# Altium PCB Enc30x20 136.PcbDoc
Units mm, origin at the board's own origin, x right, y up, seen from the top; angles counter-clockwise.
Board outline 113 x 105 mm, 2 copper layers (Top Layer, Bottom Layer), stack 1.525 mm thick; 4 components, 3 nets, 4 pads, 0 vias.
Unrouted connection lines stored in the file: 7.
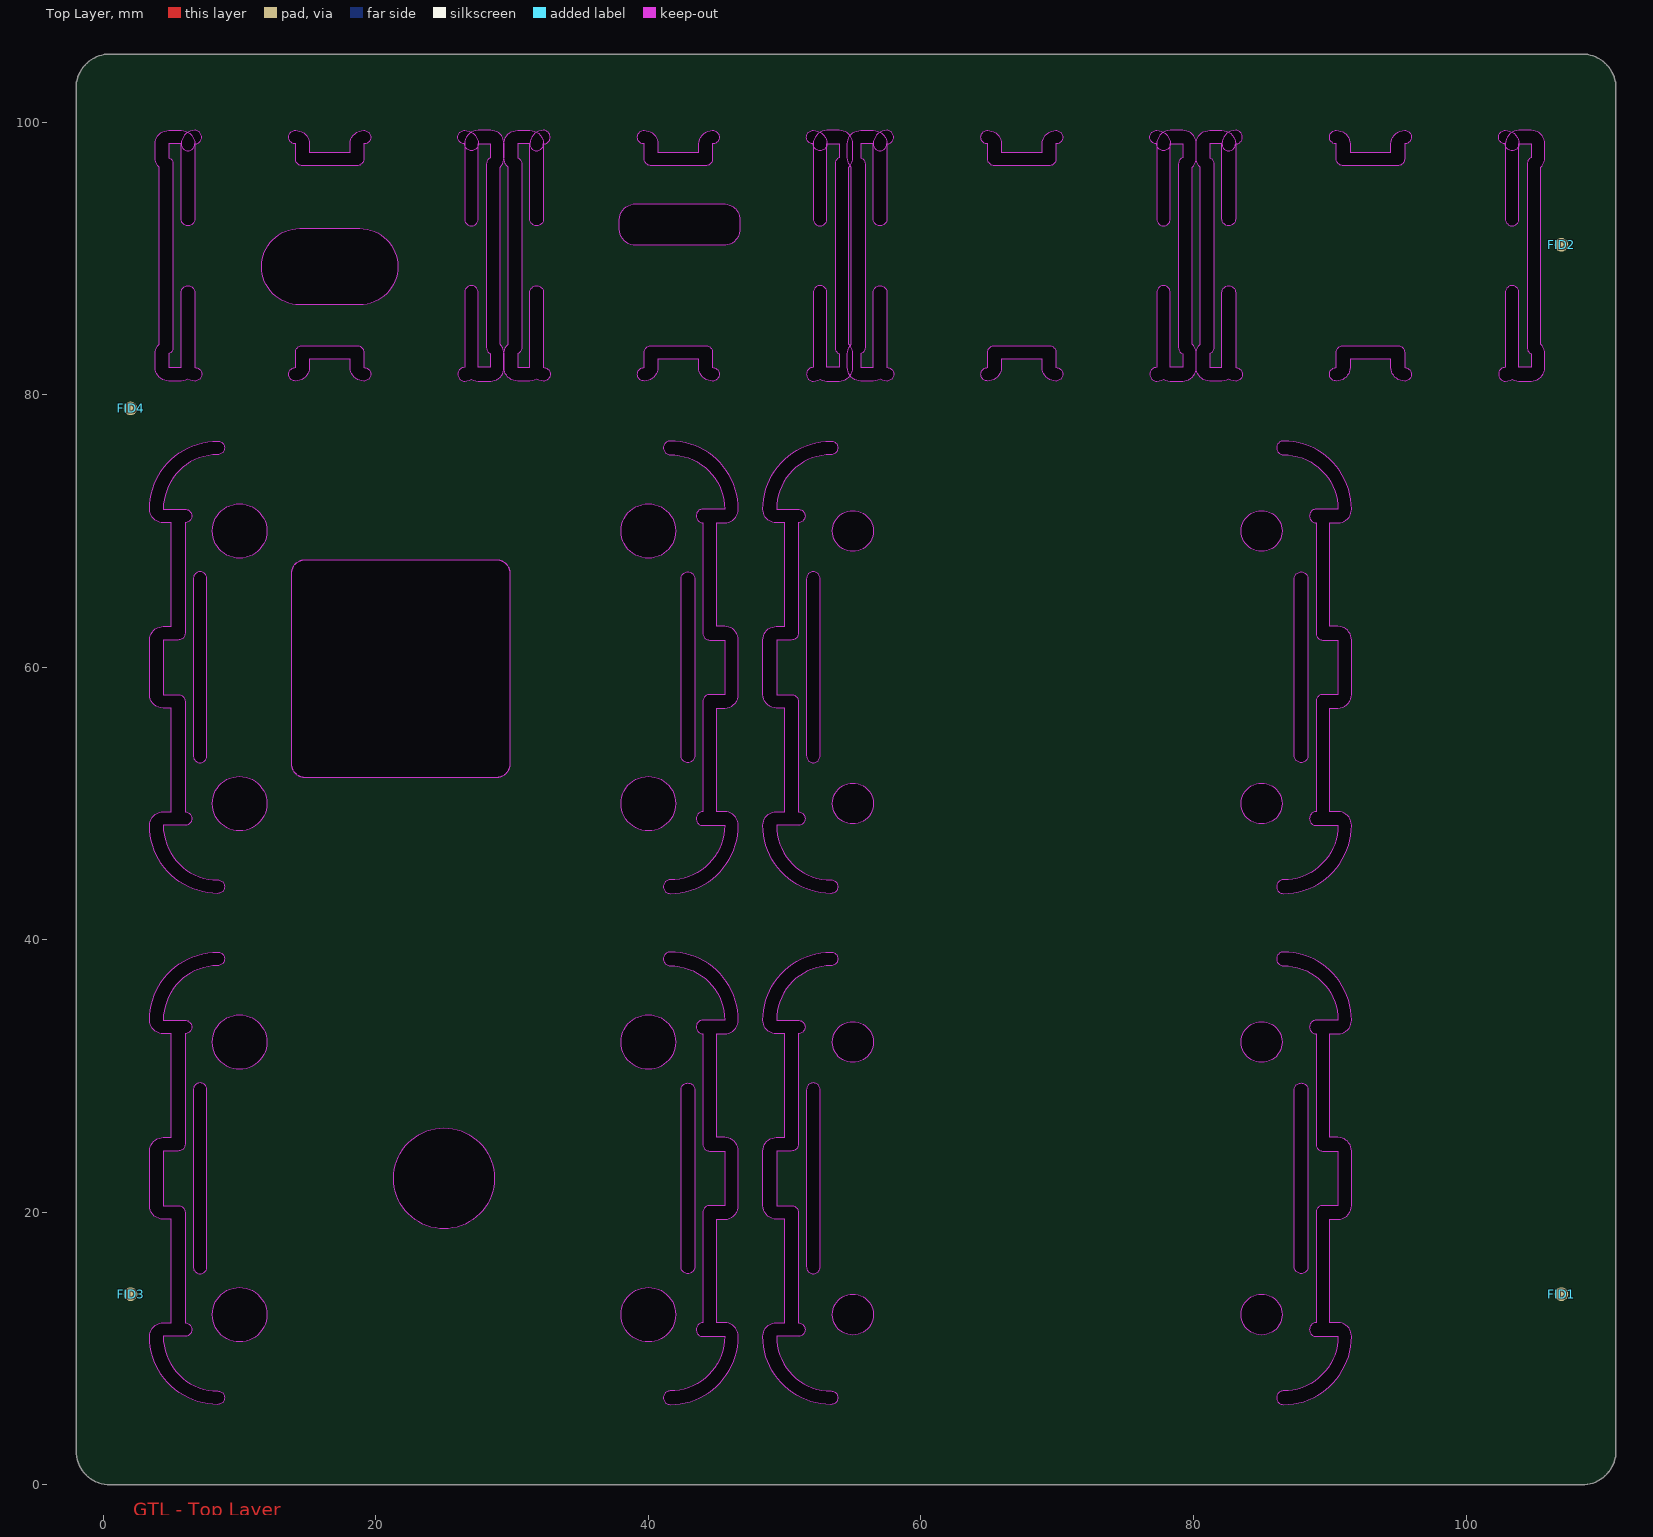
[diagram p0: Top Layer view]
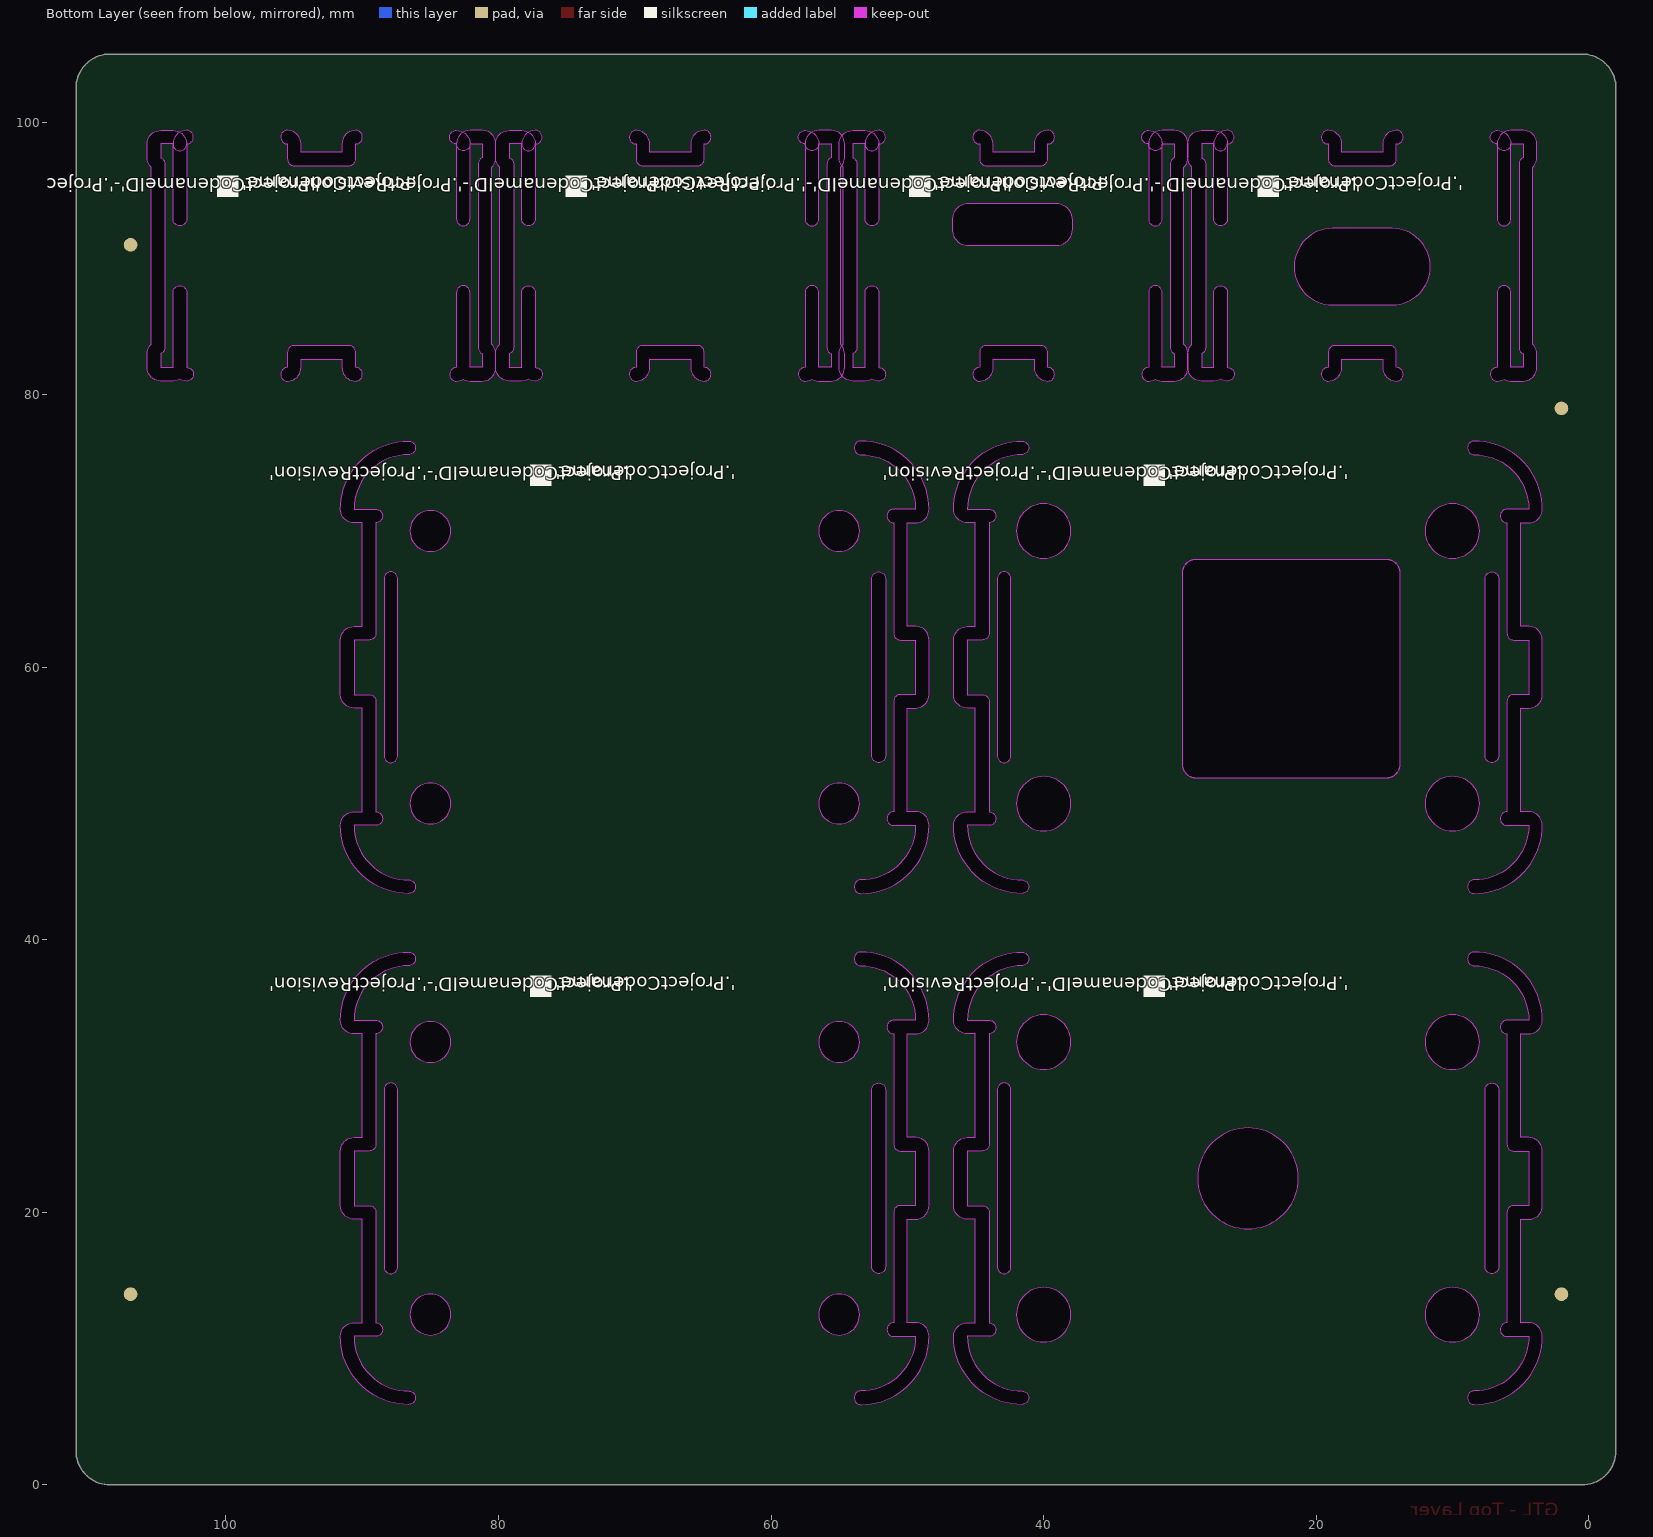
[diagram p1: Bottom Layer view, seen from below]

## Layer stack, top to bottom
Top Solder: solder mask 0.0102, Solder Resist, Dk 3.5
Top Layer: signal copper 0.0356
Dielectric 1: core 1.454, FR-4, Dk 4.2
Bottom Layer: signal copper 0.0356
Bottom Solder: solder mask 0.0102, Solder Resist, Dk 3.5

## Board outline
-2,2.5 -2,102.5 cw(c0.5,102.5) 0.5,105 108.5,105 cw(c108.5,102.5) 111,102.5 111,2.5 cw(c108.5,2.5) 108.5,0 0.5,0 cw(c0.5,2.5)
cut-out: 87.9,15.5 cw(c87.9,16) 87.4,16 87.4,29 cw(c87.9,29) 87.9,29.5 cw(c87.9,29) 88.4,29 88.4,16 cw(c87.9,16)
cut-out: 52.1,15.5 ccw(c52.1,16) 52.6,16 52.6,29 ccw(c52.1,29) 52.1,29.5 ccw(c52.1,29) 51.6,29 51.6,16 ccw(c52.1,16)
cut-out: 87.9,53 cw(c87.9,53.5) 87.4,53.5 87.4,66.5 cw(c87.9,66.5) 87.9,67 cw(c87.9,66.5) 88.4,66.5 88.4,53.5 cw(c87.9,53.5)
cut-out: 52.1,53 ccw(c52.1,53.5) 52.6,53.5 52.6,66.5 ccw(c52.1,66.5) 52.1,67 ccw(c52.1,66.5) 51.6,66.5 51.6,53.5 ccw(c52.1,53.5)
cut-out: 42.9,53 cw(c42.9,53.5) 42.4,53.5 42.4,66.5 cw(c42.9,66.5) 42.9,67 cw(c42.9,66.5) 43.4,66.5 43.4,53.5 cw(c42.9,53.5)
cut-out: 7.1,53 ccw(c7.1,53.5) 7.6,53.5 7.6,66.5 ccw(c7.1,66.5) 7.1,67 ccw(c7.1,66.5) 6.6,66.5 6.6,53.5 ccw(c7.1,53.5)
cut-out: 7.1,15.5 ccw(c7.1,16) 7.6,16 7.6,29 ccw(c7.1,29) 7.1,29.5 ccw(c7.1,29) 6.6,29 6.6,16 ccw(c7.1,16)
cut-out: 42.9,15.5 cw(c42.9,16) 42.4,16 42.4,29 cw(c42.9,29) 42.9,29.5 cw(c42.9,29) 43.4,29 43.4,16 cw(c42.9,16)
cut-out: 55,11 cw(c55,12.5) 53.5,12.5 cw(c55,12.5) 55,14 cw(c55,12.5) 56.5,12.5 cw(c55,12.5)
cut-out: 55,31 cw(c55,32.5) 53.5,32.5 cw(c55,32.5) 55,34 cw(c55,32.5) 56.5,32.5 cw(c55,32.5)
cut-out: 85,31 cw(c85,32.5) 83.5,32.5 cw(c85,32.5) 85,34 cw(c85,32.5) 86.5,32.5 cw(c85,32.5)
cut-out: 85,11 cw(c85,12.5) 83.5,12.5 cw(c85,12.5) 85,14 cw(c85,12.5) 86.5,12.5 cw(c85,12.5)
cut-out: 85,48.5 cw(c85,50) 83.5,50 cw(c85,50) 85,51.5 cw(c85,50) 86.5,50 cw(c85,50)
cut-out: 85,68.5 cw(c85,70) 83.5,70 cw(c85,70) 85,71.5 cw(c85,70) 86.5,70 cw(c85,70)
cut-out: 55,68.5 cw(c55,70) 53.5,70 cw(c55,70) 55,71.5 cw(c55,70) 56.5,70 cw(c55,70)
cut-out: 55,48.5 cw(c55,50) 53.5,50 cw(c55,50) 55,51.5 cw(c55,50) 56.5,50 cw(c55,50)
cut-out: 40,30.5 cw(c40,32.5) 38,32.5 cw(c40,32.5) 40,34.5 cw(c40,32.5) 42,32.5 cw(c40,32.5)
cut-out: 40,10.5 cw(c40,12.5) 38,12.5 cw(c40,12.5) 40,14.5 cw(c40,12.5) 42,12.5 cw(c40,12.5)
cut-out: 10,10.5 cw(c10,12.5) 8,12.5 cw(c10,12.5) 10,14.5 cw(c10,12.5) 12,12.5 cw(c10,12.5)
cut-out: 10,30.5 cw(c10,32.5) 8,32.5 cw(c10,32.5) 10,34.5 cw(c10,32.5) 12,32.5 cw(c10,32.5)
cut-out: 10,68 cw(c10,70) 8,70 cw(c10,70) 10,72 cw(c10,70) 12,70 cw(c10,70)
cut-out: 10,48 cw(c10,50) 8,50 cw(c10,50) 10,52 cw(c10,50) 12,50 cw(c10,50)
cut-out: 40,48 cw(c40,50) 38,50 cw(c40,50) 40,52 cw(c40,50) 42,50 cw(c40,50)
cut-out: 40,68 cw(c40,70) 38,70 cw(c40,70) 40,72 cw(c40,70) 42,70 cw(c40,70)
cut-out: 25,18.8 cw(c25,22.5) 21.3,22.5 cw(c25,22.5) 25,26.2 cw(c25,22.5) 28.7,22.5 cw(c25,22.5)
cut-out: 48.4,10.897 cw(c49.4,10.9) 49.4,11.9 50,11.9 50,19.5 49.4,19.5 cw(c49.4,20.5) 48.4,20.5 48.4,24.5 cw(c49.4,24.5) 49.4,25.5 50,25.5 50,33.1 49.4,33.1 cw(c49.4,34.1) 48.4,34.103 cw(c53.4,34.1) 53.397,39.1 53.4,39.1 cw(c53.4,38.6) 53.9,38.6 cw(c53.4,38.6) 53.4,38.1 53.398,38.1 ccw(c53.4,34.1) 49.4,34.102 49.4,34.1 50.993,34.1 cw(c50.993,33.6) 51.493,33.6 cw(c50.993,33.6) 51,33.1 51,25 cw(c50.5,25) 50.5,24.5 49.4,24.5 49.4,20.5 50.5,20.5 cw(c50.5,20) 51,20 51,11.9 cw(c50.993,11.4) 51.493,11.4 cw(c50.993,11.4) 50.993,10.9 49.4,10.9 49.4,10.898 ccw(c53.4,10.9) 53.398,6.9 53.4,6.9 cw(c53.4,6.4) 53.9,6.4 cw(c53.4,6.4) 53.4,5.9 53.397,5.9 cw(c53.4,10.9)
cut-out: 91.6,10.897 ccw(c90.6,10.9) 90.6,11.9 90,11.9 90,19.5 90.6,19.5 ccw(c90.6,20.5) 91.6,20.5 91.6,24.5 ccw(c90.6,24.5) 90.6,25.5 90,25.5 90,33.1 90.6,33.1 ccw(c90.6,34.1) 91.6,34.103 ccw(c86.6,34.1) 86.603,39.1 86.6,39.1 ccw(c86.6,38.6) 86.1,38.6 ccw(c86.6,38.6) 86.6,38.1 86.602,38.1 cw(c86.6,34.1) 90.6,34.102 90.6,34.1 89.007,34.1 ccw(c89.007,33.6) 88.507,33.6 ccw(c89.007,33.6) 89,33.1 89,25 ccw(c89.5,25) 89.5,24.5 90.6,24.5 90.6,20.5 89.5,20.5 ccw(c89.5,20) 89,20 89,11.9 ccw(c89.007,11.4) 88.507,11.4 ccw(c89.007,11.4) 89.007,10.9 90.6,10.9 90.6,10.898 cw(c86.6,10.9) 86.602,6.9 86.6,6.9 ccw(c86.6,6.4) 86.1,6.4 ccw(c86.6,6.4) 86.6,5.9 86.603,5.9 ccw(c86.6,10.9)
cut-out: 3.4,10.897 cw(c4.4,10.9) 4.4,11.9 5,11.9 5,19.5 4.4,19.5 cw(c4.4,20.5) 3.4,20.5 3.4,24.5 cw(c4.4,24.5) 4.4,25.5 5,25.5 5,33.1 4.4,33.1 cw(c4.4,34.1) 3.4,34.103 cw(c8.4,34.1) 8.397,39.1 8.4,39.1 cw(c8.4,38.6) 8.9,38.6 cw(c8.4,38.6) 8.4,38.1 8.398,38.1 ccw(c8.4,34.1) 4.4,34.102 4.4,34.1 5.993,34.1 cw(c5.993,33.6) 6.493,33.6 cw(c5.993,33.6) 6,33.1 6,25 cw(c5.5,25) 5.5,24.5 4.4,24.5 4.4,20.5 5.5,20.5 cw(c5.5,20) 6,20 6,11.9 cw(c5.993,11.4) 6.493,11.4 cw(c5.993,11.4) 5.993,10.9 4.4,10.9 4.4,10.898 ccw(c8.4,10.9) 8.398,6.9 8.4,6.9 cw(c8.4,6.4) 8.9,6.4 cw(c8.4,6.4) 8.4,5.9 8.397,5.9 cw(c8.4,10.9)
cut-out: 46.6,10.897 ccw(c45.6,10.9) 45.6,11.9 45,11.9 45,19.5 45.6,19.5 ccw(c45.6,20.5) 46.6,20.5 46.6,24.5 ccw(c45.6,24.5) 45.6,25.5 45,25.5 45,33.1 45.6,33.1 ccw(c45.6,34.1) 46.6,34.103 ccw(c41.6,34.1) 41.603,39.1 41.6,39.1 ccw(c41.6,38.6) 41.1,38.6 ccw(c41.6,38.6) 41.6,38.1 41.602,38.1 cw(c41.6,34.1) 45.6,34.102 45.6,34.1 44.007,34.1 ccw(c44.007,33.6) 43.507,33.6 ccw(c44.007,33.6) 44,33.1 44,25 ccw(c44.5,25) 44.5,24.5 45.6,24.5 45.6,20.5 44.5,20.5 ccw(c44.5,20) 44,20 44,11.9 ccw(c44.007,11.4) 43.507,11.4 ccw(c44.007,11.4) 44.007,10.9 45.6,10.9 45.6,10.898 cw(c41.6,10.9) 41.602,6.9 41.6,6.9 ccw(c41.6,6.4) 41.1,6.4 ccw(c41.6,6.4) 41.6,5.9 41.603,5.9 ccw(c41.6,10.9)
cut-out: 48.4,48.397 cw(c49.4,48.4) 49.4,49.4 50,49.4 50,57 49.4,57 cw(c49.4,58) 48.4,58 48.4,62 cw(c49.4,62) 49.4,63 50,63 50,70.6 49.4,70.6 cw(c49.4,71.6) 48.4,71.603 cw(c53.4,71.6) 53.397,76.6 53.4,76.6 cw(c53.4,76.1) 53.9,76.1 cw(c53.4,76.1) 53.4,75.6 53.398,75.6 ccw(c53.4,71.6) 49.4,71.602 49.4,71.6 50.993,71.6 cw(c50.993,71.1) 51.493,71.1 cw(c50.993,71.1) 51,70.6 51,62.5 cw(c50.5,62.5) 50.5,62 49.4,62 49.4,58 50.5,58 cw(c50.5,57.5) 51,57.5 51,49.4 cw(c50.993,48.9) 51.493,48.9 cw(c50.993,48.9) 50.993,48.4 49.4,48.4 49.4,48.398 ccw(c53.4,48.4) 53.398,44.4 53.4,44.4 cw(c53.4,43.9) 53.9,43.9 cw(c53.4,43.9) 53.4,43.4 53.397,43.4 cw(c53.4,48.4)
cut-out: 91.6,48.397 ccw(c90.6,48.4) 90.6,49.4 90,49.4 90,57 90.6,57 ccw(c90.6,58) 91.6,58 91.6,62 ccw(c90.6,62) 90.6,63 90,63 90,70.6 90.6,70.6 ccw(c90.6,71.6) 91.6,71.603 ccw(c86.6,71.6) 86.603,76.6 86.6,76.6 ccw(c86.6,76.1) 86.1,76.1 ccw(c86.6,76.1) 86.6,75.6 86.602,75.6 cw(c86.6,71.6) 90.6,71.602 90.6,71.6 89.007,71.6 ccw(c89.007,71.1) 88.507,71.1 ccw(c89.007,71.1) 89,70.6 89,62.5 ccw(c89.5,62.5) 89.5,62 90.6,62 90.6,58 89.5,58 ccw(c89.5,57.5) 89,57.5 89,49.4 ccw(c89.007,48.9) 88.507,48.9 ccw(c89.007,48.9) 89.007,48.4 90.6,48.4 90.6,48.398 cw(c86.6,48.4) 86.602,44.4 86.6,44.4 ccw(c86.6,43.9) 86.1,43.9 ccw(c86.6,43.9) 86.6,43.4 86.603,43.4 ccw(c86.6,48.4)
cut-out: 46.6,48.397 ccw(c45.6,48.4) 45.6,49.4 45,49.4 45,57 45.6,57 ccw(c45.6,58) 46.6,58 46.6,62 ccw(c45.6,62) 45.6,63 45,63 45,70.6 45.6,70.6 ccw(c45.6,71.6) 46.6,71.603 ccw(c41.6,71.6) 41.603,76.6 41.6,76.6 ccw(c41.6,76.1) 41.1,76.1 ccw(c41.6,76.1) 41.6,75.6 41.602,75.6 cw(c41.6,71.6) 45.6,71.602 45.6,71.6 44.007,71.6 ccw(c44.007,71.1) 43.507,71.1 ccw(c44.007,71.1) 44,70.6 44,62.5 ccw(c44.5,62.5) 44.5,62 45.6,62 45.6,58 44.5,58 ccw(c44.5,57.5) 44,57.5 44,49.4 ccw(c44.007,48.9) 43.507,48.9 ccw(c44.007,48.9) 44.007,48.4 45.6,48.4 45.6,48.398 cw(c41.6,48.4) 41.602,44.4 41.6,44.4 ccw(c41.6,43.9) 41.1,43.9 ccw(c41.6,43.9) 41.6,43.4 41.603,43.4 ccw(c41.6,48.4)
cut-out: 90.484,97.3 90.484,98.4 cw(c90.484,98.9) 90.484,99.4 cw(c90.484,98.4) 91.485,98.4 91.485,97.8 94.484,97.8 94.484,98.4 cw(c95.484,98.4) 95.484,99.4 cw(c95.484,98.9) 95.985,98.9 cw(c95.484,98.9) 95.485,98.4 95.485,97.3 cw(c94.984,97.3) 94.984,96.8 90.984,96.8 cw(c90.984,97.3)
cut-out: 80.184,82 80.184,83 cw(c81.184,83) 80.484,83.714 80.484,96.686 cw(c81.184,97.4) 80.184,97.4 80.184,98.4 cw(c81.184,98.4) 81.184,99.4 82.084,99.4 cw(c82.084,98.4) 83.085,98.41 83.085,98.403 83.085,92.9 cw(c82.584,92.9) 82.084,92.9 82.084,98.4 81.185,98.4 81.185,97.4 cw(c80.984,96.942) 81.485,96.942 81.485,96.94 81.485,83.46 81.485,83.458 cw(c80.984,83.458) 81.185,83 81.185,82 82.084,82 82.084,87.495 cw(c82.584,87.495) 83.085,87.495 83.085,82 cw(c83.084,81.5) 83.585,81.5 cw(c83.084,81.5) 83.084,81 cw(c83.084,82) 82.584,81.134 cw(c82.084,82) 82.084,81 81.184,81 cw(c81.184,82)
cut-out: 82.084,98.41 ccw(c82.584,98.405) 83.085,98.4 83.084,98.4 ccw(c83.084,98.9) 83.585,98.9 ccw(c83.084,98.9) 83.084,99.4 ccw(c83.084,98.4)
cut-out: 90.484,81 cw(c90.484,81.5) 90.484,82 90.484,83.1 cw(c90.984,83.1) 90.984,83.6 94.983,83.6 cw(c94.983,83.1) 95.337,83.453 cw(c94.984,83.098) 95.485,83.098 95.485,82 cw(c95.484,81.5) 95.985,81.5 cw(c95.484,81.5) 95.484,81 cw(c95.484,82) 94.484,82 94.484,82.6 91.485,82.6 91.485,82 cw(c90.484,82)
cut-out: 103.883,98.41 cw(c103.383,98.405) 102.882,98.4 102.883,98.4 cw(c102.883,98.9) 102.382,98.9 cw(c102.883,98.9) 102.883,99.4 cw(c102.883,98.4)
cut-out: 105.783,82 105.783,83 ccw(c104.783,83) 105.483,83.714 105.483,96.686 ccw(c104.783,97.4) 105.783,97.4 105.783,98.4 ccw(c104.783,98.4) 104.783,99.4 103.883,99.4 ccw(c103.883,98.4) 102.882,98.41 102.882,98.403 102.882,92.9 ccw(c103.383,92.9) 103.883,92.9 103.883,98.4 104.782,98.4 104.782,97.4 ccw(c104.983,96.942) 104.482,96.942 104.482,96.94 104.482,83.46 104.482,83.458 ccw(c104.983,83.458) 104.782,83 104.782,82 103.883,82 103.883,87.495 ccw(c103.383,87.495) 102.882,87.495 102.882,82 ccw(c102.883,81.5) 102.382,81.5 ccw(c102.883,81.5) 102.883,81 ccw(c102.883,82) 103.383,81.134 ccw(c103.883,82) 103.883,81 104.783,81 ccw(c104.783,82)
cut-out: 64.9,97.3 64.9,98.4 cw(c64.9,98.9) 64.9,99.4 cw(c64.9,98.4) 65.9,98.4 65.9,97.8 68.9,97.8 68.9,98.4 cw(c69.9,98.4) 69.9,99.4 cw(c69.9,98.9) 70.4,98.9 cw(c69.9,98.9) 69.9,98.4 69.9,97.3 cw(c69.4,97.3) 69.4,96.8 65.4,96.8 cw(c65.4,97.3)
cut-out: 54.6,82 54.6,83 cw(c55.6,83) 54.9,83.714 54.9,96.686 cw(c55.6,97.4) 54.6,97.4 54.6,98.4 cw(c55.6,98.4) 55.6,99.4 56.5,99.4 cw(c56.5,98.4) 57.5,98.41 57.5,98.403 57.5,92.9 cw(c57,92.9) 56.5,92.9 56.5,98.4 55.6,98.4 55.6,97.4 cw(c55.4,96.942) 55.9,96.942 55.9,96.94 55.9,83.46 55.9,83.458 cw(c55.4,83.458) 55.6,83 55.6,82 56.5,82 56.5,87.495 cw(c57,87.495) 57.5,87.495 57.5,82 cw(c57.5,81.5) 58,81.5 cw(c57.5,81.5) 57.5,81 cw(c57.5,82) 57,81.134 cw(c56.5,82) 56.5,81 55.6,81 cw(c55.6,82)
cut-out: 56.5,98.41 ccw(c57,98.405) 57.5,98.4 ccw(c57.5,98.9) 58,98.9 ccw(c57.5,98.9) 57.5,99.4 ccw(c57.5,98.4)
cut-out: 64.9,81 cw(c64.9,81.5) 64.9,82 64.9,83.1 cw(c65.4,83.1) 65.4,83.6 69.398,83.6 cw(c69.398,83.1) 69.753,83.453 cw(c69.4,83.098) 69.9,83.098 69.9,82 cw(c69.9,81.5) 70.4,81.5 cw(c69.9,81.5) 69.9,81 cw(c69.9,82) 68.9,82 68.9,82.6 65.9,82.6 65.9,82 cw(c64.9,82)
cut-out: 78.299,98.41 cw(c77.798,98.405) 77.298,98.4 cw(c77.298,98.9) 76.798,98.9 cw(c77.298,98.9) 77.298,99.4 cw(c77.298,98.4)
cut-out: 80.199,82 80.199,83 ccw(c79.198,83) 79.899,83.714 79.899,96.686 ccw(c79.198,97.4) 80.199,97.4 80.199,98.4 ccw(c79.198,98.4) 79.198,99.4 78.298,99.4 ccw(c78.298,98.4) 77.298,98.41 77.298,98.403 77.298,92.9 ccw(c77.798,92.9) 78.299,92.9 78.299,98.4 79.198,98.4 79.198,97.4 ccw(c79.398,96.942) 78.898,96.942 78.898,96.94 78.898,83.46 78.898,83.458 ccw(c79.398,83.458) 79.198,83 79.198,82 78.299,82 78.299,87.495 ccw(c77.798,87.495) 77.298,87.495 77.298,82 ccw(c77.298,81.5) 76.798,81.5 ccw(c77.298,81.5) 77.298,81 ccw(c77.298,82) 77.798,81.134 ccw(c78.298,82) 78.298,81 79.198,81 ccw(c79.198,82)
cut-out: 39.7,97.3 39.7,98.4 cw(c39.7,98.9) 39.7,99.4 cw(c39.7,98.4) 40.7,98.4 40.7,97.8 43.7,97.8 43.7,98.4 cw(c44.7,98.4) 44.7,99.4 cw(c44.7,98.9) 45.2,98.9 cw(c44.7,98.9) 44.7,98.4 44.7,97.3 cw(c44.2,97.3) 44.2,96.8 40.2,96.8 cw(c40.2,97.3)
cut-out: 29.4,82 29.4,83 cw(c30.4,83) 29.7,83.714 29.7,96.686 cw(c30.4,97.4) 29.4,97.4 29.4,98.4 cw(c30.4,98.4) 30.4,99.4 31.3,99.4 cw(c31.3,98.4) 32.3,98.41 32.3,98.403 32.3,92.9 cw(c31.8,92.9) 31.3,92.9 31.3,98.4 30.4,98.4 30.4,97.4 cw(c30.2,96.942) 30.7,96.942 30.7,96.94 30.7,83.46 30.7,83.458 cw(c30.2,83.458) 30.4,83 30.4,82 31.3,82 31.3,87.495 cw(c31.8,87.495) 32.3,87.495 32.3,82 cw(c32.3,81.5) 32.8,81.5 cw(c32.3,81.5) 32.3,81 cw(c32.3,82) 31.8,81.134 cw(c31.3,82) 31.3,81 30.4,81 cw(c30.4,82)
cut-out: 31.3,98.41 ccw(c31.8,98.405) 32.3,98.4 ccw(c32.3,98.9) 32.8,98.9 ccw(c32.3,98.9) 32.3,99.4 ccw(c32.3,98.4)
cut-out: 39.7,81 cw(c39.7,81.5) 39.7,82 39.7,83.1 cw(c40.2,83.1) 40.2,83.6 44.198,83.6 cw(c44.198,83.1) 44.553,83.453 cw(c44.2,83.098) 44.7,83.098 44.7,82 cw(c44.7,81.5) 45.2,81.5 cw(c44.7,81.5) 44.7,81 cw(c44.7,82) 43.7,82 43.7,82.6 40.7,82.6 40.7,82 cw(c39.7,82)
cut-out: 53.099,98.41 cw(c52.598,98.405) 52.098,98.4 cw(c52.098,98.9) 51.598,98.9 cw(c52.098,98.9) 52.098,99.4 cw(c52.098,98.4)
cut-out: 54.999,82 54.999,83 ccw(c53.998,83) 54.699,83.714 54.699,96.686 ccw(c53.998,97.4) 54.999,97.4 54.999,98.4 ccw(c53.998,98.4) 53.998,99.4 53.098,99.4 ccw(c53.098,98.4) 52.098,98.41 52.098,98.403 52.098,92.9 ccw(c52.598,92.9) 53.099,92.9 53.099,98.4 53.998,98.4 53.998,97.4 ccw(c54.198,96.942) 53.698,96.942 53.698,96.94 53.698,83.46 53.698,83.458 ccw(c54.198,83.458) 53.998,83 53.998,82 53.099,82 53.099,87.495 ccw(c52.598,87.495) 52.098,87.495 52.098,82 ccw(c52.098,81.5) 51.598,81.5 ccw(c52.098,81.5) 52.098,81 ccw(c52.098,82) 52.598,81.134 ccw(c53.098,82) 53.098,81 53.998,81 ccw(c53.998,82)
cut-out: 29.415,82 29.415,83 ccw(c28.414,83) 29.115,83.714 29.115,96.686 ccw(c28.414,97.4) 29.415,97.4 29.415,98.4 ccw(c28.414,98.4) 28.414,99.4 27.514,99.4 ccw(c27.514,98.4) 26.514,98.41 26.514,98.403 26.514,92.9 ccw(c27.014,92.9) 27.514,92.9 27.514,98.4 28.414,98.4 28.414,97.4 ccw(c28.614,96.942) 28.114,96.942 28.114,96.94 28.114,83.46 28.114,83.458 ccw(c28.614,83.458) 28.414,83 28.414,82 27.514,82 27.514,87.495 ccw(c27.014,87.495) 26.514,87.495 26.514,82 ccw(c26.514,81.5) 26.014,81.5 ccw(c26.514,81.5) 26.514,81 ccw(c26.514,82) 27.014,81.134 ccw(c27.514,82) 27.514,81 28.414,81 ccw(c28.414,82)
cut-out: 27.514,98.41 cw(c27.014,98.405) 26.514,98.4 cw(c26.514,98.9) 26.014,98.9 cw(c26.514,98.9) 26.514,99.4 cw(c26.514,98.4)
cut-out: 14.116,81 cw(c14.116,81.5) 14.115,82 14.115,83.1 cw(c14.616,83.1) 14.616,83.6 18.614,83.6 cw(c18.614,83.1) 18.969,83.453 cw(c18.616,83.098) 19.116,83.098 19.116,82 cw(c19.116,81.5) 19.616,81.5 cw(c19.116,81.5) 19.116,81 cw(c19.116,82) 18.115,82 18.115,82.6 15.116,82.6 15.116,82 cw(c14.116,82)
cut-out: 5.715,98.41 ccw(c6.216,98.405) 6.716,98.4 ccw(c6.716,98.9) 7.216,98.9 ccw(c6.716,98.9) 6.716,99.4 ccw(c6.716,98.4)
cut-out: 3.815,82 3.815,83 cw(c4.816,83) 4.115,83.714 4.115,96.686 cw(c4.816,97.4) 3.815,97.4 3.815,98.4 cw(c4.816,98.4) 4.816,99.4 5.716,99.4 cw(c5.716,98.4) 6.716,98.41 6.716,98.403 6.716,92.9 cw(c6.216,92.9) 5.715,92.9 5.715,98.4 4.816,98.4 4.816,97.4 cw(c4.616,96.942) 5.116,96.942 5.116,96.94 5.116,83.46 5.116,83.458 cw(c4.616,83.458) 4.816,83 4.816,82 5.715,82 5.715,87.495 cw(c6.216,87.495) 6.716,87.495 6.716,82 cw(c6.716,81.5) 7.216,81.5 cw(c6.716,81.5) 6.716,81 cw(c6.716,82) 6.216,81.134 cw(c5.716,82) 5.716,81 4.816,81 cw(c4.816,82)
cut-out: 14.115,97.3 14.115,98.4 cw(c14.116,98.9) 14.116,99.4 cw(c14.116,98.4) 15.116,98.4 15.116,97.8 18.115,97.8 18.115,98.4 cw(c19.116,98.4) 19.116,99.4 cw(c19.116,98.9) 19.616,98.9 cw(c19.116,98.9) 19.116,98.4 19.116,97.3 cw(c18.616,97.3) 18.616,96.8 14.616,96.8 cw(c14.616,97.3)
cut-out: 39.076,90.95 cw(c39.076,92.15) 37.876,92.15 37.876,92.81 cw(c39.076,92.81) 37.877,92.841 cw(c39.076,92.81) 39.076,94.01 45.516,94.01 cw(c45.516,92.815) 45.624,94.005 cw(c45.516,92.807) 45.972,93.92 cw(c45.519,92.817) 46.071,93.874 cw(c45.513,92.805) 46.343,93.679 cw(c45.522,92.816) 46.437,93.579 cw(c45.513,92.808) 46.619,93.283 46.625,93.269 cw(c45.517,92.81) 46.716,92.81 46.716,92.15 cw(c45.523,92.15) 46.711,92.042 cw(c45.513,92.151) 46.626,91.694 cw(c45.523,92.147) 46.58,91.595 cw(c45.511,92.153) 46.386,91.323 cw(c45.522,92.144) 46.285,91.229 cw(c45.514,92.154) 45.989,91.047 45.975,91.041 cw(c45.516,92.15) 45.516,90.95
cut-out: 14.416,86.6 cw(c14.416,89.4) 11.616,89.4 cw(c14.416,89.4) 14.416,92.2 18.816,92.2 cw(c18.816,89.4) 21.616,89.4 cw(c18.816,89.4) 18.816,86.6
cut-out: 3.4,48.397 cw(c4.4,48.4) 4.4,49.4 5,49.4 5,57 4.4,57 cw(c4.4,58) 3.4,58 3.4,62 cw(c4.4,62) 4.4,63 5,63 5,70.6 4.4,70.6 cw(c4.4,71.6) 3.4,71.603 cw(c8.4,71.6) 8.397,76.6 8.4,76.6 cw(c8.4,76.1) 8.9,76.1 cw(c8.4,76.1) 8.4,75.6 8.398,75.6 ccw(c8.4,71.6) 4.4,71.602 4.4,71.6 5.993,71.6 cw(c5.993,71.1) 6.493,71.1 cw(c5.993,71.1) 6,70.6 6,62.5 cw(c5.5,62.5) 5.5,62 4.4,62 4.4,58 5.5,58 cw(c5.5,57.5) 6,57.5 6,49.4 cw(c5.993,48.9) 6.493,48.9 cw(c5.993,48.9) 5.993,48.4 4.4,48.4 4.4,48.398 ccw(c8.4,48.4) 8.398,44.4 8.4,44.4 cw(c8.4,43.9) 8.9,43.9 cw(c8.4,43.9) 8.4,43.4 8.397,43.4 cw(c8.4,48.4)
cut-out: 848 vertices, not listed, extent 13.832,51.899 29.832,67.899

## Design rules (kind name [scope] priority, off if disabled: settings)
AssemblyTestPointUsage [All] p1: valid=2
BoardOutlineClearance [Not (OnLayer('Component Keepout'))] p1: gap=0.3 ignorepadtopadclearanceinfootprint=FALSE except(0: Arc-SplitContinuation Track-SplitContinuation SMDPad-SplitContinuation THPad-SplitContinuation Via-SplitContinuation Fill-SplitContinuation Poly-SplitContinuation Region-OutlineEdge Region-SplitContinuation Text-OutlineEdge Text-SplitContinuation; 0.2: Track-OutlineEdge Fill-CavityEdge Fill-CutoutEdge Fill-SplitBarrior Poly-CavityEdge Poly-CutoutEdge Poly-SplitBarrior Text-CavityEdge Text-CutoutEdge Text-SplitBarrior; 0.25: SMDPad-OutlineEdge)
Clearance [All] p1: gap=0.125 ignorepadtopadclearanceinfootprint=FALSE except(0: Arc-Hole Track-Hole SMDPad-Hole THPad-Hole Via-Hole Fill-Hole Poly-Hole Region-Hole Text-Hole)
ComponentClearance [All] p1: gap=0.1 collisioncheckmode=3 verticalgap=0.254 showdistances=FALSE
DiffPairsRouting [All] p1: maxlimit=2 minlimit=0.15 mostfreqgap=0.15 toplayer_minwidth=0.15 toplayer_maxwidth=2 toplayer_prefwidth=0.15 bottomlayer_minwidth=0.15 bottomlayer_maxwidth=2 bottomlayer_prefwidth=0.15 substack1={CB9D278B-8BF5-444A-AAF4-837A2A9DF42D} toplayer_{cb9d278b-8bf5-444a-aaf4-837a2a9df42d}_minwidth=0.381 toplayer_{cb9d278b-8bf5-444a-aaf4-837a2a9df42d}_maxwidth=0.381 toplayer_{cb9d278b-8bf5-444a-aaf4-837a2a9df42d}_prefwidth=0.381 bottomlayer_{cb9d278b-8bf5-444a-aaf4-837a2a9df42d}_minwidth=0.381 bottomlayer_{cb9d278b-8bf5-444a-aaf4-837a2a9df42d}_maxwidth=0.381 bottomlayer_{cb9d278b-8bf5-444a-aaf4-837a2a9df42d}_prefwidth=0.381 substack2={826B8647-A721-4255-895A-19F9591B9CD1} toplayer_{826b8647-a721-4255-895a-19f9591b9cd1}_minwidth=0.381 toplayer_{826b8647-a721-4255-895a-19f9591b9cd1}_maxwidth=0.381 toplayer_{826b8647-a721-4255-895a-19f9591b9cd1}_prefwidth=0.381 bottomlayer_{826b8647-a721-4255-895a-19f9591b9cd1}_minwidth=0.381 bottomlayer_{826b8647-a721-4255-895a-19f9591b9cd1}_maxwidth=0.381 bottomlayer_{826b8647-a721-4255-895a-19f9591b9cd1}_prefwidth=0.381 substack3={E64FCAF4-1BC8-437D-B1E0-0E5F2DC0F59E} toplayer_{e64fcaf4-1bc8-437d-b1e0-0e5f2dc0f59e}_minwidth=0.381 toplayer_{e64fcaf4-1bc8-437d-b1e0-0e5f2dc0f59e}_maxwidth=0.381 toplayer_{e64fcaf4-1bc8-437d-b1e0-0e5f2dc0f59e}_prefwidth=0.381 bottomlayer_{e64fcaf4-1bc8-437d-b1e0-0e5f2dc0f59e}_minwidth=0.381 bottomlayer_{e64fcaf4-1bc8-437d-b1e0-0e5f2dc0f59e}_maxwidth=0.381 bottomlayer_{e64fcaf4-1bc8-437d-b1e0-0e5f2dc0f59e}_prefwidth=0.381 substack4={E61CE66C-507C-4E1E-8E83-C905434AFC1C} toplayer_{e61ce66c-507c-4e1e-8e83-c905434afc1c}_minwidth=0.381 toplayer_{e61ce66c-507c-4e1e-8e83-c905434afc1c}_maxwidth=0.381 toplayer_{e61ce66c-507c-4e1e-8e83-c905434afc1c}_prefwidth=0.381 bottomlayer_{e61ce66c-507c-4e1e-8e83-c905434afc1c}_minwidth=0.381 bottomlayer_{e61ce66c-507c-4e1e-8e83-c905434afc1c}_maxwidth=0.381 bottomlayer_{e61ce66c-507c-4e1e-8e83-c905434afc1c}_prefwidth=0.381 maxuncoupledlength=25
FabricationTestPointUsage [All] p1: valid=2 allowmultiple=FALSE
HoleSize [All] p1: absolutevalues=TRUE maxlimit=3.1 minlimit=0.2 maxpercent=80.000 minpercent=20.000
MinimumSolderMaskSliver [All] p1: minsoldermaskwidth=0.005
PasteMaskExpansion [All] p1: expansion=-0.075 percent=-35.000000
PlaneClearance [All] p1: clearance=0.3
PlaneConnect [All] p1: planeconnectstyle=Relief reliefexpansion=0.5 reliefentries=4 reliefconductorwidth=0.2 reliefairgap=0.3
PolygonConnect "PolygonConnect GND" [isVIA] p1: connectstyle=Relief reliefconductorwidth=0.2 reliefentries=4 polygonreliefangle="90 Angle" airgapwidth=0.2
PolygonConnect [All] p2: connectstyle=Relief reliefconductorwidth=0.2 reliefentries=4 polygonreliefangle="90 Angle" airgapwidth=0.2
RoutingVias [All] p1: holewidth=0.3 width=0.6 viastyle="Through Hole" minholewidth=0.3 minwidth=0.6 maxholewidth=0.5 maxwidth=0.8
SilkToSilkClearance [All] p1: silktosilkclearance=0.001
SilkToSolderMaskClearance [IsPad] p1: minsilkscreentomaskgap=0.05 clearancetoexposedcopper=TRUE
SolderMaskExpansion [All] p1: expansion=0.075 istentingtop=FALSE
Width [All] p1: maxlimit=2 minlimit=0.15 preferedwidth=0.15 substack1={CB9D278B-8BF5-444A-AAF4-837A2A9DF42D} substack2={826B8647-A721-4255-895A-19F9591B9CD1} substack3={E64FCAF4-1BC8-437D-B1E0-0E5F2DC0F59E} substack4={E61CE66C-507C-4E1E-8E83-C905434AFC1C} minimp=50.000000 maximp=50.000000 favimp=50.000000
19 further rules are at their usual default settings.

## Components (designator, comment, footprint, x,y, rotation, side; value= is the part's Value field where it differs from the comment)
FID1 "Comment" "Pad1mm soldermask2mm doublesided" 107,14 r0 top
FID2 "Comment" "Pad1mm soldermask2mm doublesided" 107,91 r0 top
FID3 "Comment" "Pad1mm soldermask2mm doublesided" 2,14 r0 top
FID4 "Comment" "Pad1mm soldermask2mm doublesided" 2,79 r0 top

## Footprints (in the part's own frame and the unit in brackets; to place one, negate y for a bottom-side part, rotate by r counter-clockwise, add the part's x,y. Pads: shape width x height; smd on the part's side, far side on the other; paste and mask are expansions set on the pad)
"Pad1mm soldermask2mm doublesided" [mm] "Testpoint/fiducial pad 1mm diameter with 2mm diameter soldermask"
  round 1 all layers, no hole paste-1 mask+0.5: 1(0,0)

## Nets (pads, with @x,y where several pads share a name; then routed paths per layer and width w, separated by ;. In a path a pad name is that pad's centre, name@x,y a point inside that pad or via, vN(x,y) a via of type N, cw(c..) or ccw(c..) an arc to the next point about the centre after c; other vN are vias at no path point)
GND: 
JD_DATA: 
JD_PWR: 
pads on no net: FID1.1 FID2.1 FID3.1 FID4.1

## Other copper
Top Layer:
  text "GTL - Top Layer" at 2.211,-2.616 h1.7
Bottom Layer:
  text "GBL - Bottom Layer" at 2.211,-4.116 h1.7

## Silkscreen, mask and mechanical layers (free items; w line width, h text height)
Top Overlay:
  text "GTO - Top Overlay" at 17.711,-5.652 h1.7
Bottom Overlay:
  rectangle: 31.1,35.8 32.675,37.393
  rectangle: 76.1,35.8 77.675,37.393
  rectangle: 76.1,73.3 77.675,74.893
  rectangle: 31.1,73.3 32.675,74.893
  rectangle: 22.716,94.5 24.291,96.092
  rectangle: 48.3,94.5 49.875,96.093
  rectangle: 99.084,94.5 100.659,96.092
  rectangle: 73.5,94.5 75.075,96.092
  text "'.ProjectCodename'" at 9.216,96 h1 r180
  text "'.ProjectCodename'" at 34.8,96 h1 r180
  text "'.ProjectCodename'" at 60,96 h1 r180
  text "'.ProjectCodename'" at 85.584,96 h1 r180
  text "'.ProjectCodenameID'-'.ProjectRevision'" at 16.716,95.9 h1 r180
  text "'.ProjectCodenameID'-'.ProjectRevision'" at 42.3,95.9 h1 r180
  text "'.ProjectCodenameID'-'.ProjectRevision'" at 67.5,95.9 h1 r180
  text "'.ProjectCodenameID'-'.ProjectRevision'" at 93.084,95.9 h1 r180
  text "'.ProjectCodename'" at 17.6,74.8 h1 r180
  text "'.ProjectCodename'" at 62.6,74.8 h1 r180
  text "'.ProjectCodenameID'-'.ProjectRevision'" at 25.1,74.7 h1 r180
  text "'.ProjectCodenameID'-'.ProjectRevision'" at 70.1,74.7 h1 r180
  text "'.ProjectCodename'" at 17.6,37.3 h1 r180
  text "'.ProjectCodename'" at 62.6,37.3 h1 r180
  text "'.ProjectCodenameID'-'.ProjectRevision'" at 25.1,37.2 h1 r180
  text "'.ProjectCodenameID'-'.ProjectRevision'" at 70.1,37.2 h1 r180
  text "GBO - Bottom Overlay" at 17.711,-7.152 h1.7
Top Paste:
  text "GTP - Top Paste" at 31.911,-2.616 h1.7
Bottom Paste:
  text "GBP - Bottom Paste" at 31.911,-4.116 h1.7
Top Solder:
  text "GTS - Top Solder (resist)" at 31.911,-5.652 h1.7
Bottom Solder:
  text "GBS - Bottom Solder (resist)" at 31.911,-7.152 h1.7
Fabrication Notes:
  text "Notes:" at 51.583,-4.295 h3
  text "GM3 - Fabrication Notes" at 2.211,-5.652 h1.7
  text "V-score lines on GM9" at 59.583,-12.435 h2.3
Route Tool Path:
  lines w1: 4.616,83.458 ccw(c4.816,83) 4.316,83 4.316,82.998 4.316,82 ccw(c4.816,82) 4.816,81.5 5.716,81.5 ccw(c5.716,82) 6.216,81.995 ccw(c6.716,82) 6.716,81.5 ; 4.616,83.46 4.616,96.94 ; 6.216,81.992 6.216,87.495 ; 6.216,92.9 6.216,98.403 ; 6.716,98.9 ccw(c6.716,98.4) 6.216,98.405 ccw(c5.716,98.4) 5.716,98.9 4.816,98.9 ccw(c4.816,98.4) 4.316,98.4 4.316,97.402 4.316,97.4 ccw(c4.816,97.4) 4.616,96.942 ; 14.116,81.5 ccw(c14.116,82) 14.616,82 14.616,83.1 18.614,83.1 ; 14.116,98.9 cw(c14.116,98.4) 14.616,98.4 14.616,97.3 18.616,97.3 18.616,98.4 cw(c19.116,98.4) 19.116,98.9 ; 18.616,83.098 18.616,82 ccw(c19.116,82) 19.116,81.5 ; 4.616,96.942 ccw(c5.116,96.942) 4.616,96.942
Board Outline Only:
  lines w0.1: -2,2.5 ccw(c0.5,2.5) 0.5,0 ; -2,102.5 cw(c0.5,102.5) 0.5,105 ; 108.5,0 ccw(c108.5,2.5) 111,2.5 ; 108.5,105 cw(c108.5,102.5) 111,102.5
  lines w0.2: -2,2.5 -2,102.5 ; 0.5,0 108.5,0 ; 0.5,105 108.5,105 ; 111,2.5 111,102.5 ; 4.083,0.035 70.083,0.035 4.083,0.035
  text "GM6 - Board Outline Only" at 2.211,-7.151 h1.7
V Score:
  lines w0.01: -2,6.9 111,6.9 ; -2,38.1 111,38.1 ; -2,44.4 111,44.4 ; -2,75.6 111,75.6 ; -2,82 111,82 ; -1.997,98.4 111,98.4
  text "GM9 - V Score" at 31.911,-8.615 h1.7
Board Outline:
  drawing of 1316 lines, arcs and shapes, not listed
  text "GM11 - Board Outline + Cutouts" at 2.211,-8.651 h1.7
Top Assy:
  text "GM15 - Top Assy" at 17.711,-2.62 h1.7
Bottom Assy:
  text "GM16 - Bottom Assy" at 17.711,-4.12 h1.7